# Altium PCB PCB.PcbDoc (part 3 of 3)
Units mm, origin at the board's own origin, x right, y up, seen from the top; angles counter-clockwise.
Board outline 53 x 36 mm, 2 copper layers (Top Layer, Bottom Layer); 30 components, 49 nets, 163 pads, 111 vias.
Unrouted connection lines stored in the file: 1.
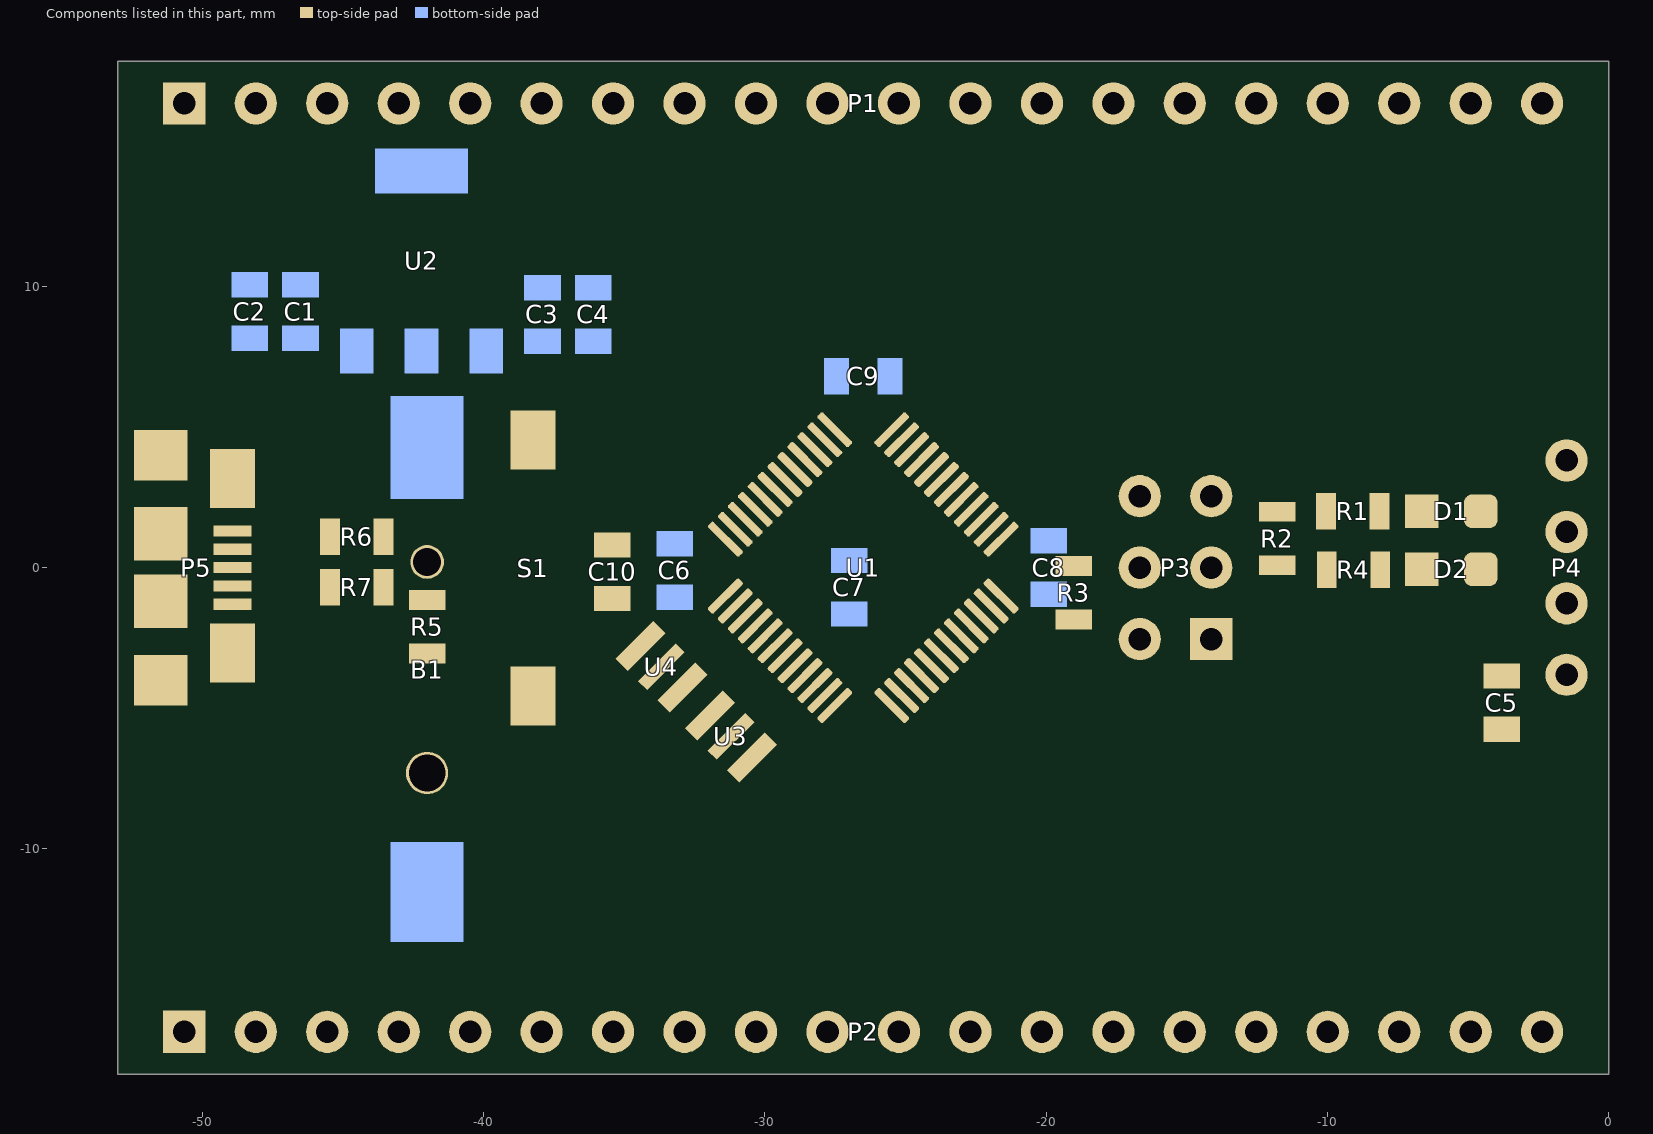
[diagram p3: the components of this part, seen from the top]

## Via types
v1: diameter 0.8, hole 0.5, Top Layer to Bottom Layer, tented both sides, 111 vias

## Nets (pads, with @x,y where several pads share a name; then routed paths per layer and width w, separated by ;. In a path a pad name is that pad's centre, name@x,y a point inside that pad or via, vN(x,y) a via of type N, cw(c..) or ccw(c..) an arc to the next point about the centre after c; other vN are vias at no path point) (continued)
copper on no net: (continued)
  Bottom Layer w0.018: -24.704,-12.861 -24.509,-12.861 ; -24.704,-12.843 -24.491,-12.843 ; -24.704,-12.665 -24.491,-12.665 ; -24.704,-12.647 -24.509,-12.647 ; -24.704,-10.247 -24.153,-10.247 ; -24.704,-10.229 -24.153,-10.229 ; -24.704,-10.211 -24.153,-10.211 ; -24.704,-10.194 -24.171,-10.194 ; -24.687,-13.625 -24.491,-13.625 ; -24.687,-13.376 -24.491,-13.376 ; -24.687,-10.318 -24.135,-10.318 ; -24.687,-10.3 -24.135,-10.3 ; -24.687,-10.282 -24.135,-10.282 ; -24.687,-10.265 -24.153,-10.265 ; -24.669,-12.878 -24.544,-12.878 ; -24.669,-12.629 -24.544,-12.629 ; -24.669,-10.389 -24.118,-10.389 ; -24.669,-10.371 -24.118,-10.371 ; -24.669,-10.354 -24.118,-10.354 ; -24.669,-10.336 -24.135,-10.336 ; -24.651,-13.643 -24.527,-13.643 ; -24.651,-13.358 -24.527,-13.358 ; -24.651,-10.442 -24.1,-10.442 ; -24.651,-10.425 -24.1,-10.425 ; -24.651,-10.407 -24.118,-10.407 ; -24.633,-10.514 -24.082,-10.514 ; -24.633,-10.496 -24.082,-10.496 ; -24.633,-10.478 -24.1,-10.478 ; -24.633,-10.46 -24.1,-10.46 ; -24.615,-10.585 -24.064,-10.585 ; -24.615,-10.567 -24.064,-10.567 ; -24.615,-10.549 -24.082,-10.549 ; -24.615,-10.531 -24.082,-10.531 ; -24.598,-10.602 -24.064,-10.602 ; -24.562,-12.825 -24.473,-12.825 ; -24.562,-12.683 -24.473,-12.683 ; -24.544,-13.589 -24.455,-13.589 ; -24.544,-13.412 -24.455,-13.412 ; -24.544,-12.807 -24.473,-12.807 ; -24.544,-12.789 -24.473,-12.789 ; -24.544,-12.772 -24.473,-12.772 ; -24.544,-12.754 -24.473,-12.754 ; -24.544,-12.736 -24.473,-12.736 ; -24.544,-12.718 -24.473,-12.718 ; -24.544,-12.7 -24.473,-12.7 ; -24.544,-11.776 -23.762,-11.776 ; -24.544,-11.758 -23.762,-11.758 ; -24.527,-11.847 -23.762,-11.847 ; -24.527,-11.829 -23.762,-11.829 ; -24.527,-11.811 -23.762,-11.811 ; -24.527,-11.794 -23.762,-11.794 ; -24.509,-13.572 -24.455,-13.572 ; -24.509,-13.554 -24.438,-13.554 ; -24.509,-13.447 -24.438,-13.447 ; -24.509,-13.429 -24.455,-13.429 ; -24.509,-11.918 -23.762,-11.918 ; -24.509,-11.9 -23.762,-11.9 ; -24.509,-11.883 -23.762,-11.883 ; -24.509,-11.865 -23.762,-11.865 ; -24.509,-11.011 -23.958,-11.011 ; -24.509,-10.994 -23.958,-10.994 ; -24.509,-10.976 -23.975,-10.976 ; -24.509,-10.958 -23.975,-10.958 ; -24.491,-13.536 -24.438,-13.536 ; -24.491,-13.518 -24.438,-13.518 ; -24.491,-13.501 -24.438,-13.501 ; -24.491,-13.483 -24.438,-13.483 ; -24.491,-13.465 -24.438,-13.465 ; -24.491,-11.989 -23.78,-11.989 ; -24.491,-11.972 -23.762,-11.972 ; -24.491,-11.954 -23.762,-11.954 ; -24.491,-11.936 -23.762,-11.936 ; -24.491,-11.083 -23.94,-11.083 ; -24.491,-11.065 -23.94,-11.065 ; -24.491,-11.047 -23.958,-11.047 ; -24.491,-11.029 -23.958,-11.029 ; -24.473,-12.06 -23.869,-12.06 ; -24.473,-12.043 -23.833,-12.043 ; -24.473,-12.025 -23.798,-12.025 ; -24.473,-12.007 -23.78,-12.007 ; -24.473,-11.154 -23.922,-11.154 ; -24.473,-11.136 -23.922,-11.136 ; -24.473,-11.118 -23.94,-11.118 ; -24.473,-11.1 -23.94,-11.1 ; -24.455,-12.078 -23.922,-12.078 ; -24.455,-11.225 -23.904,-11.225 ; -24.455,-11.207 -23.904,-11.207 ; -24.455,-11.189 -23.904,-11.189 ; -24.455,-11.171 -23.922,-11.171 ; -24.438,-11.296 -23.886,-11.296 ; -24.438,-11.278 -23.886,-11.278 ; -24.438,-11.26 -23.886,-11.26 ; -24.438,-11.243 -23.904,-11.243 ; -24.42,-12.683 -24.278,-12.683 ; -24.42,-12.665 -24.278,-12.665 ; -24.42,-12.647 -24.349,-12.647 ; -24.42,-12.629 -24.366,-12.629 ; -24.42,-11.367 -23.869,-11.367 ; -24.42,-11.349 -23.869,-11.349 ; -24.42,-11.331 -23.869,-11.331 ; -24.42,-11.314 -23.886,-11.314 ; -24.402,-11.438 -23.851,-11.438 ; -24.402,-11.42 -23.851,-11.42 ; -24.402,-11.403 -23.851,-11.403 ; -24.402,-11.385 -23.869,-11.385 ; -24.384,-13.643 -24.331,-13.643 ; -24.384,-13.625 -24.331,-13.625 ; -24.384,-13.607 -24.331,-13.607 ; -24.384,-13.589 -24.331,-13.589 ; -24.384,-13.572 -24.331,-13.572 ; -24.384,-13.554 -24.331,-13.554 ; -24.384,-13.536 -24.331,-13.536 ; -24.384,-13.518 -24.331,-13.518 ; -24.384,-13.501 -24.331,-13.501 ; -24.384,-13.483 -24.331,-13.483 ; -24.384,-13.465 -24.331,-13.465 ; -24.384,-13.447 -24.331,-13.447 ; -24.384,-13.429 -24.331,-13.429 ; -24.384,-13.412 -24.331,-13.412 ; -24.384,-13.394 -24.331,-13.394 ; -24.384,-13.376 -24.331,-13.376 ; -24.384,-13.358 -24.331,-13.358 ; -24.384,-11.509 -23.833,-11.509 ; -24.384,-11.491 -23.833,-11.491 ; -24.384,-11.474 -23.833,-11.474 ; -24.384,-11.456 -23.851,-11.456 ; -24.366,-11.74 -23.78,-11.74 ; -24.366,-11.58 -23.815,-11.58 ; -24.366,-11.563 -23.815,-11.563 ; -24.366,-11.545 -23.815,-11.545 ; -24.366,-11.527 -23.833,-11.527 ; -24.349,-12.754 -24.278,-12.754 ; -24.349,-12.736 -24.278,-12.736 ; -24.349,-12.718 -24.278,-12.718 ; -24.349,-12.7 -24.278,-12.7 ; -24.349,-11.723 -23.78,-11.723 ; -24.349,-11.705 -23.78,-11.705 ; -24.349,-11.669 -23.798,-11.669 ; -24.349,-11.651 -23.798,-11.651 ; -24.349,-11.634 -23.798,-11.634 ; -24.349,-11.616 -23.798,-11.616 ; -24.349,-11.598 -23.815,-11.598 ; -24.331,-12.878 -24.278,-12.878 ; -24.331,-12.861 -24.278,-12.861 ; -24.331,-12.843 -24.278,-12.843 ; -24.331,-12.825 -24.278,-12.825 ; -24.331,-12.807 -24.278,-12.807 ; -24.331,-12.789 -24.278,-12.789 ; -24.331,-12.772 -24.278,-12.772 ; -24.331,-12.647 -24.278,-12.647 ; -24.331,-12.629 -24.278,-12.629 ; -24.331,-11.687 -23.78,-11.687 ; -24.295,-12.096 -24.082,-12.096 ; -24.278,-13.554 -24.224,-13.554 ; -24.278,-13.536 -24.224,-13.536 ; -24.278,-13.518 -24.224,-13.518 ; -24.278,-13.501 -24.224,-13.501 ; -24.278,-13.483 -24.224,-13.483 ; -24.278,-13.465 -24.224,-13.465 ; -24.278,-13.447 -24.224,-13.447 ; -24.26,-13.589 -24.189,-13.589 ; -24.26,-13.572 -24.206,-13.572 ; -24.26,-13.429 -24.206,-13.429 ; -24.26,-13.412 -24.189,-13.412 ; -24.242,-13.607 -24.029,-13.607 ; -24.242,-13.394 -24.029,-13.394 ; -24.224,-13.625 -24.029,-13.625 ; -24.224,-13.376 -24.029,-13.376 ; -24.206,-13.643 -24.029,-13.643 ; -24.206,-13.358 -24.029,-13.358 ; -24.206,-12.878 -24.1,-12.878 ; -24.206,-12.861 -24.082,-12.861 ; -24.206,-12.843 -24.064,-12.843 ; -24.189,-12.665 -24.011,-12.665 ; -24.189,-12.647 -24.011,-12.647 ; -24.189,-12.629 -24.011,-12.629 ; -24.153,-12.825 -24.064,-12.825 ; -24.135,-12.807 -24.064,-12.807 ; -24.135,-12.789 -24.064,-12.789 ; -24.135,-12.772 -24.064,-12.772 ; -24.135,-12.754 -24.064,-12.754 ; -24.135,-12.736 -24.064,-12.736 ; -24.135,-12.718 -24.064,-12.718 ; -24.135,-12.7 -24.064,-12.7 ; -24.135,-12.683 -24.064,-12.683 ; -24.135,-12.612 -24.064,-12.612 ; -24.135,-12.594 -24.064,-12.594 ; -24.135,-12.576 -24.064,-12.576 ; -24.135,-12.558 -24.1,-12.558 ; -24.082,-13.589 -24.029,-13.589 ; -24.082,-13.572 -24.029,-13.572 ; -24.082,-13.554 -24.029,-13.554 ; -24.082,-13.536 -24.029,-13.536 ; -24.082,-13.518 -24.029,-13.518 ; -24.082,-13.501 -24.029,-13.501 ; -24.082,-13.483 -24.029,-13.483 ; -24.082,-13.465 -24.029,-13.465 ; -24.082,-13.447 -24.029,-13.447 ; -24.082,-13.429 -24.029,-13.429 ; -24.082,-13.412 -24.029,-13.412 ; -23.993,-13.643 -23.94,-13.643 ; -23.975,-13.625 -23.922,-13.625 ; -23.975,-13.607 -23.922,-13.607 ; -23.975,-13.589 -23.922,-13.589 ; -23.975,-12.878 -23.851,-12.878 ; -23.975,-12.861 -23.815,-12.861 ; -23.975,-12.843 -23.798,-12.843 ; -23.975,-12.665 -23.798,-12.665 ; -23.975,-12.647 -23.815,-12.647 ; -23.975,-12.629 -23.851,-12.629 ; -23.958,-13.572 -23.726,-13.572 ; -23.958,-13.554 -23.726,-13.554 ; -23.958,-13.536 -23.726,-13.536 ; -23.94,-13.518 -23.886,-13.518 ; -23.94,-13.501 -23.886,-13.501 ; -23.922,-13.483 -23.869,-13.483 ; -23.922,-13.465 -23.869,-13.465 ; -23.922,-13.447 -23.851,-13.447 ; -23.922,-10.158 -23.371,-10.158 ; -23.904,-13.429 -23.851,-13.429 ; -23.904,-13.412 -23.851,-13.412 ; -23.904,-10.229 -23.353,-10.229 ; -23.904,-10.211 -23.353,-10.211 ; -23.904,-10.194 -23.353,-10.194 ; -23.904,-10.176 -23.353,-10.176 ; -23.886,-13.394 -23.798,-13.394 ; -23.886,-13.376 -23.798,-13.376 ; -23.886,-13.358 -23.798,-13.358 ; -23.886,-12.825 -23.798,-12.825 ; -23.886,-12.683 -23.798,-12.683 ; -23.886,-10.3 -23.335,-10.3 ; -23.886,-10.282 -23.335,-10.282 ; -23.886,-10.265 -23.335,-10.265 ; -23.886,-10.247 -23.335,-10.247 ; -23.869,-12.807 -23.78,-12.807 ; -23.869,-12.7 -23.78,-12.7 ; -23.869,-10.371 -23.317,-10.371 ; -23.869,-10.354 -23.317,-10.354 ; -23.869,-10.336 -23.317,-10.336 ; -23.869,-10.318 -23.317,-10.318 ; -23.851,-12.789 -23.78,-12.789 ; -23.851,-12.772 -23.78,-12.772 ; -23.851,-12.754 -23.78,-12.754 ; -23.851,-12.736 -23.78,-12.736 ; -23.851,-12.718 -23.78,-12.718 ; -23.851,-10.442 -23.3,-10.442 ; -23.851,-10.425 -23.3,-10.425 ; -23.851,-10.407 -23.3,-10.407 ; -23.851,-10.389 -23.3,-10.389 ; -23.833,-13.447 -23.762,-13.447 ; -23.833,-13.429 -23.78,-13.429 ; -23.833,-13.412 -23.78,-13.412 ; -23.833,-10.514 -23.282,-10.514 ; -23.833,-10.496 -23.282,-10.496 ; -23.833,-10.478 -23.282,-10.478 ; -23.833,-10.46 -23.282,-10.46 ; -23.815,-13.483 -23.762,-13.483 ; -23.815,-13.465 -23.762,-13.465 ; -23.815,-10.585 -23.264,-10.585 ; -23.815,-10.567 -23.264,-10.567 ; -23.815,-10.549 -23.264,-10.549 ; -23.815,-10.531 -23.282,-10.531 ; -23.798,-13.518 -23.744,-13.518 ; -23.798,-13.501 -23.744,-13.501 ; -23.798,-10.656 -23.246,-10.656 ; -23.798,-10.638 -23.246,-10.638 ; -23.798,-10.62 -23.246,-10.62 ; -23.798,-10.602 -23.264,-10.602 ; -23.78,-10.709 -23.229,-10.709 ; -23.78,-10.691 -23.229,-10.691 ; -23.78,-10.674 -23.246,-10.674 ; -23.762,-13.625 -23.709,-13.625 ; -23.762,-13.607 -23.709,-13.607 ; -23.762,-13.589 -23.709,-13.589 ; -23.762,-10.78 -23.211,-10.78 ; -23.762,-10.762 -23.211,-10.762 ; -23.762,-10.745 -23.229,-10.745 ; -23.762,-10.727 -23.229,-10.727 ; -23.744,-13.643 -23.691,-13.643 ; -23.744,-10.851 -23.193,-10.851 ; -23.744,-10.834 -23.193,-10.834 ; -23.744,-10.816 -23.211,-10.816 ; -23.744,-10.798 -23.211,-10.798 ; -23.726,-10.922 -23.175,-10.922 ; -23.726,-10.905 -23.175,-10.905 ; -23.726,-10.887 -23.193,-10.887 ; -23.726,-10.869 -23.193,-10.869 ; -23.709,-12.772 -23.477,-12.772 ; -23.709,-12.754 -23.477,-12.754 ; -23.709,-12.736 -23.477,-12.736 ; -23.709,-12.718 -23.655,-12.718 ; -23.709,-12.7 -23.638,-12.7 ; -23.709,-12.683 -23.638,-12.683 ; -23.709,-10.994 -23.157,-10.994 ; -23.709,-10.976 -23.157,-10.976 ; -23.709,-10.958 -23.175,-10.958 ; -23.709,-10.94 -23.175,-10.94 ; -23.691,-12.878 -23.549,-12.878 ; -23.691,-12.861 -23.513,-12.861 ; -23.691,-12.843 -23.495,-12.843 ; -23.691,-12.825 -23.673,-12.825 ; -23.691,-12.665 -23.495,-12.665 ; -23.691,-11.065 -23.14,-11.065 ; -23.691,-11.047 -23.14,-11.047 ; -23.691,-11.029 -23.157,-11.029 ; -23.691,-11.011 -23.157,-11.011 ; -23.673,-12.647 -23.513,-12.647 ; -23.673,-11.136 -23.122,-11.136 ; -23.673,-11.118 -23.122,-11.118 ; -23.673,-11.1 -23.14,-11.1 ; -23.673,-11.083 -23.14,-11.083 ; -23.655,-13.643 -23.602,-13.643 ; -23.655,-13.625 -23.602,-13.625 ; -23.655,-13.607 -23.602,-13.607 ; -23.655,-13.589 -23.602,-13.589 ; -23.655,-13.572 -23.602,-13.572 ; -23.655,-13.554 -23.602,-13.554 ; -23.655,-13.536 -23.602,-13.536 ; -23.655,-13.518 -23.602,-13.518 ; -23.655,-13.501 -23.602,-13.501 ; -23.655,-13.483 -23.602,-13.483 ; -23.655,-13.465 -23.602,-13.465 ; -23.655,-13.447 -23.602,-13.447 ; -23.655,-13.429 -23.602,-13.429 ; -23.655,-13.412 -23.549,-13.412 ; -23.655,-13.394 -23.549,-13.394 ; -23.655,-13.376 -23.566,-13.376 ; -23.655,-13.358 -23.566,-13.358 ; -23.655,-12.629 -23.531,-12.629 ; -23.655,-11.207 -23.104,-11.207 ; -23.655,-11.189 -23.104,-11.189 ; -23.655,-11.171 -23.122,-11.171 ; -23.655,-11.154 -23.122,-11.154 ; -23.638,-11.278 -23.086,-11.278 ; -23.638,-11.26 -23.086,-11.26 ; -23.638,-11.243 -23.104,-11.243 ; -23.638,-11.225 -23.104,-11.225 ; -23.62,-11.349 -23.069,-11.349 ; -23.62,-11.331 -23.069,-11.331 ; -23.62,-11.314 -23.086,-11.314 ; -23.62,-11.296 -23.086,-11.296 ; -23.602,-11.42 -23.051,-11.42 ; -23.602,-11.403 -23.051,-11.403 ; -23.602,-11.385 -23.069,-11.385 ; -23.602,-11.367 -23.069,-11.367 ; -23.584,-13.465 -23.531,-13.465 ; -23.584,-13.447 -23.531,-13.447 ; -23.584,-13.429 -23.549,-13.429 ; -23.584,-11.491 -23.033,-11.491 ; -23.584,-11.474 -23.033,-11.474 ; -23.584,-11.456 -23.051,-11.456 ; -23.584,-11.438 -23.051,-11.438 ; -23.566,-13.536 -23.513,-13.536 ; -23.566,-13.518 -23.513,-13.518 ; -23.566,-13.501 -23.513,-13.501 ; -23.566,-13.483 -23.531,-13.483 ; -23.566,-12.825 -23.477,-12.825 ; -23.566,-11.563 -23.015,-11.563 ; -23.566,-11.545 -23.015,-11.545 ; -23.566,-11.527 -23.033,-11.527 ; -23.566,-11.509 -23.033,-11.509 ; -23.549,-13.607 -23.46,-13.607 ; -23.549,-13.589 -23.46,-13.589 ; -23.549,-13.572 -23.46,-13.572 ; -23.549,-13.554 -23.513,-13.554 ; -23.549,-12.807 -23.477,-12.807 ; -23.549,-12.7 -23.477,-12.7 ; -23.549,-12.683 -23.477,-12.683 ; -23.549,-11.634 -22.997,-11.634 ; -23.549,-11.616 -22.997,-11.616 ; -23.549,-11.598 -23.015,-11.598 ; -23.549,-11.58 -23.015,-11.58 ; -23.531,-13.643 -23.477,-13.643 ; -23.531,-13.625 -23.477,-13.625 ; -23.531,-12.789 -23.477,-12.789 ; -23.531,-12.718 -23.477,-12.718 ; -23.531,-11.705 -22.98,-11.705 ; -23.531,-11.687 -22.98,-11.687 ; -23.531,-11.669 -22.997,-11.669 ; -23.531,-11.651 -22.997,-11.651 ; -23.513,-11.776 -22.962,-11.776 ; -23.513,-11.758 -22.962,-11.758 ; -23.513,-11.74 -22.98,-11.74 ; -23.513,-11.723 -22.98,-11.723 ; -23.495,-13.554 -23.46,-13.554 ; -23.495,-13.536 -23.442,-13.536 ; -23.495,-13.518 -23.442,-13.518 ; -23.495,-13.501 -23.442,-13.501 ; -23.495,-11.847 -22.944,-11.847 ; -23.495,-11.829 -22.944,-11.829 ; -23.495,-11.811 -22.962,-11.811 ; -23.495,-11.794 -22.962,-11.794 ; -23.477,-13.483 -23.442,-13.483 ; -23.477,-13.465 -23.424,-13.465 ; -23.477,-13.447 -23.424,-13.447 ; -23.477,-11.918 -22.926,-11.918 ; -23.477,-11.9 -22.926,-11.9 ; -23.477,-11.883 -22.944,-11.883 ; -23.477,-11.865 -22.944,-11.865 ; -23.46,-13.429 -23.424,-13.429 ; -23.46,-13.412 -23.353,-13.412 ; -23.46,-13.394 -23.353,-13.394 ; -23.46,-11.989 -22.909,-11.989 ; -23.46,-11.972 -22.909,-11.972 ; -23.46,-11.954 -22.926,-11.954 ; -23.46,-11.936 -22.926,-11.936 ; -23.442,-13.376 -23.353,-13.376 ; -23.442,-13.358 -23.353,-13.358 ; -23.442,-12.06 -22.891,-12.06 ; -23.442,-12.043 -22.891,-12.043 ; -23.442,-12.025 -22.909,-12.025 ; -23.442,-12.007 -22.909,-12.007 ; -23.424,-12.078 -22.891,-12.078 ; -23.406,-13.643 -23.353,-13.643 ; -23.406,-13.625 -23.353,-13.625 ; -23.406,-13.607 -23.353,-13.607 ; -23.406,-13.589 -23.353,-13.589 ; -23.406,-13.572 -23.353,-13.572 ; -23.406,-13.554 -23.353,-13.554 ; -23.406,-13.536 -23.353,-13.536 ; -23.406,-13.518 -23.353,-13.518 ; -23.406,-13.501 -23.353,-13.501 ; -23.406,-13.483 -23.353,-13.483 ; -23.406,-13.465 -23.353,-13.465 ; -23.406,-13.447 -23.353,-13.447 ; -23.406,-13.429 -23.353,-13.429 ; -23.389,-12.878 -23.317,-12.878 ; -23.389,-12.861 -23.317,-12.861 ; -23.389,-12.843 -23.317,-12.843 ; -23.389,-12.825 -23.317,-12.825 ; -23.389,-12.807 -23.317,-12.807 ; -23.389,-12.789 -23.317,-12.789 ; -23.389,-12.772 -23.317,-12.772 ; -23.389,-12.754 -23.317,-12.754 ; -23.389,-12.736 -23.317,-12.736 ; -23.389,-12.718 -23.317,-12.718 ; -23.389,-12.7 -23.317,-12.7 ; -23.389,-12.683 -23.317,-12.683 ; -23.389,-12.665 -23.317,-12.665 ; -23.389,-12.647 -23.317,-12.647 ; -23.389,-12.629 -23.317,-12.629 ; -23.389,-12.612 -23.317,-12.612 ; -23.389,-12.594 -23.317,-12.594 ; -23.389,-12.576 -23.317,-12.576 ; -23.389,-12.558 -23.317,-12.558 ; -23.389,-12.54 -23.317,-12.54 ; -23.389,-12.523 -23.317,-12.523 ; -23.389,-12.505 -23.317,-12.505 ; -23.282,-13.643 -23.229,-13.643 ; -23.282,-13.625 -23.229,-13.625 ; -23.282,-13.607 -23.229,-13.607 ; -23.282,-13.589 -23.229,-13.589 ; -23.282,-13.572 -23.229,-13.572 ; -23.282,-13.554 -23.229,-13.554 ; -23.282,-13.536 -23.229,-13.536 ; -23.282,-13.518 -23.051,-13.518 ; -23.282,-13.501 -23.051,-13.501 ; -23.282,-13.483 -23.051,-13.483 ; -23.282,-13.465 -23.229,-13.465 ; -23.282,-13.447 -23.229,-13.447 ; -23.282,-13.429 -23.229,-13.429 ; -23.282,-13.412 -23.229,-13.412 ; -23.282,-13.394 -23.229,-13.394 ; -23.282,-13.376 -23.229,-13.376 ; -23.282,-13.358 -23.229,-13.358 ; -23.229,-12.878 -23.015,-12.878 ; -23.229,-12.861 -23.015,-12.861 ; -23.229,-12.843 -23.015,-12.843 ; -23.229,-12.576 -23.015,-12.576 ; -23.229,-12.558 -23.015,-12.558 ; -23.229,-12.54 -23.015,-12.54 ; -23.211,-12.718 -23.015,-12.718 ; -23.211,-12.7 -23.015,-12.7 ; -23.211,-12.683 -23.015,-12.683 ; -23.104,-13.643 -23.051,-13.643 ; -23.104,-13.625 -23.051,-13.625 ; -23.104,-13.607 -23.051,-13.607 ; -23.104,-13.589 -23.051,-13.589 ; -23.104,-13.572 -23.051,-13.572 ; -23.104,-13.554 -23.051,-13.554 ; -23.104,-13.536 -23.051,-13.536 ; -23.104,-13.465 -23.051,-13.465 ; -23.104,-13.447 -23.051,-13.447 ; -23.104,-13.429 -23.051,-13.429 ; -23.104,-13.412 -23.051,-13.412 ; -23.104,-13.394 -23.051,-13.394 ; -23.104,-13.376 -23.051,-13.376 ; -23.104,-13.358 -23.051,-13.358 ; -23.086,-12.825 -23.015,-12.825 ; -23.086,-12.807 -23.015,-12.807 ; -23.086,-12.789 -23.015,-12.789 ; -23.086,-12.772 -23.015,-12.772 ; -23.086,-12.754 -23.015,-12.754 ; -23.086,-12.736 -23.015,-12.736 ; -23.086,-12.665 -23.015,-12.665 ; -23.086,-12.647 -23.015,-12.647 ; -23.086,-12.629 -23.015,-12.629 ; -23.086,-12.612 -23.015,-12.612 ; -23.086,-12.594 -23.015,-12.594 ; -23.015,-13.643 -22.962,-13.643 ; -22.997,-13.625 -22.944,-13.625 ; -22.997,-13.607 -22.944,-13.607 ; -22.997,-13.589 -22.944,-13.589 ; -22.98,-13.572 -22.749,-13.572 ; -22.98,-13.554 -22.749,-13.554 ; -22.98,-13.536 -22.749,-13.536 ; -22.962,-13.518 -22.909,-13.518 ; -22.962,-13.501 -22.909,-13.501 ; -22.944,-13.483 -22.891,-13.483 ; -22.944,-13.465 -22.891,-13.465 ; -22.944,-13.447 -22.873,-13.447 ; -22.926,-13.429 -22.873,-13.429 ; -22.926,-13.412 -22.873,-13.412 ; -22.909,-13.394 -22.82,-13.394 ; -22.909,-13.376 -22.82,-13.376 ; -22.909,-13.358 -22.82,-13.358 ; -22.855,-13.447 -22.784,-13.447 ; -22.855,-13.429 -22.802,-13.429 ; -22.855,-13.412 -22.802,-13.412 ; -22.837,-13.483 -22.784,-13.483 ; -22.837,-13.465 -22.784,-13.465 ; -22.82,-13.518 -22.766,-13.518 ; -22.82,-13.501 -22.766,-13.501 ; -22.784,-13.625 -22.731,-13.625 ; -22.784,-13.607 -22.731,-13.607 ; -22.784,-13.589 -22.731,-13.589 ; -22.766,-13.643 -22.713,-13.643 ; -22.766,-12.078 -22.144,-12.078 ; -22.766,-12.06 -22.144,-12.06 ; -22.766,-12.043 -22.144,-12.043 ; -22.766,-12.025 -22.144,-12.025 ; -22.766,-12.007 -22.144,-12.007 ; -22.766,-11.989 -22.144,-11.989 ; -22.766,-11.972 -22.144,-11.972 ; -22.766,-11.954 -22.144,-11.954 ; -22.766,-11.936 -22.144,-11.936 ; -22.766,-11.918 -22.144,-11.918 ; -22.766,-11.9 -22.162,-11.9 ; -22.766,-11.883 -22.162,-11.883 ; -22.766,-11.865 -22.162,-11.865 ; -22.766,-11.847 -22.162,-11.847 ; -22.766,-11.829 -22.162,-11.829 ; -22.766,-11.811 -22.162,-11.811 ; -22.766,-11.794 -22.162,-11.794 ; -22.766,-11.776 -22.162,-11.776 ; -22.766,-11.758 -22.162,-11.758 ; -22.766,-11.74 -21.095,-11.74 ; -22.766,-11.723 -21.113,-11.723 ; -22.766,-11.705 -21.131,-11.705 ; -22.766,-11.687 -21.131,-11.687 ; -22.749,-12.914 -22.66,-12.914 ; -22.749,-12.896 -22.677,-12.896 ; -22.749,-12.878 -22.677,-12.878 ; -22.749,-12.861 -22.535,-12.861 ; -22.749,-12.843 -22.517,-12.843 ; -22.749,-12.825 -22.642,-12.825 ; -22.749,-12.807 -22.66,-12.807 ; -22.749,-12.789 -22.677,-12.789 ; -22.749,-12.772 -22.677,-12.772 ; -22.749,-12.754 -22.677,-12.754 ; -22.749,-12.736 -22.677,-12.736 ; -22.749,-12.718 -22.677,-12.718 ; -22.749,-12.7 -22.677,-12.7 ; -22.749,-12.683 -22.66,-12.683 ; -22.749,-12.665 -22.517,-12.665 ; -22.749,-12.647 -22.535,-12.647 ; -22.749,-12.629 -22.677,-12.629 ; -22.749,-11.669 -21.148,-11.669 ; -22.749,-11.651 -21.148,-11.651 ; -22.749,-11.634 -21.166,-11.634 ; -22.749,-11.616 -21.166,-11.616 ; -22.749,-11.598 -21.184,-11.598 ; -22.749,-11.58 -21.184,-11.58 ; -22.749,-11.563 -21.202,-11.563 ; -22.749,-11.545 -21.202,-11.545 ; -22.749,-11.527 -21.219,-11.527 ; -22.749,-11.509 -21.219,-11.509 ; -22.749,-11.491 -21.237,-11.491 ; -22.749,-11.474 -21.237,-11.474 ; -22.749,-11.456 -21.255,-11.456 ; -22.749,-11.438 -21.273,-11.438 ; -22.749,-11.42 -21.273,-11.42 ; -22.749,-11.403 -21.291,-11.403 ; -22.749,-11.385 -21.291,-11.385 ; -22.749,-11.367 -22.18,-11.367 ; -22.749,-11.349 -22.18,-11.349 ; -22.749,-11.331 -22.18,-11.331 ; -22.749,-11.314 -22.18,-11.314 ; -22.749,-11.296 -22.18,-11.296 ; -22.749,-11.278 -22.18,-11.278 ; -22.749,-11.26 -22.18,-11.26 ; -22.749,-11.243 -22.197,-11.243 ; -22.749,-11.225 -22.197,-11.225 ; -22.731,-12.949 -22.517,-12.949 ; -22.731,-12.932 -22.642,-12.932 ; -22.731,-11.207 -22.197,-11.207 ; -22.731,-11.189 -22.197,-11.189 ; -22.731,-11.171 -22.197,-11.171 ; -22.731,-11.154 -22.197,-11.154 ; -22.731,-11.136 -22.197,-11.136 ; -22.731,-11.118 -22.197,-11.118 ; -22.731,-11.1 -22.197,-11.1 ; -22.731,-11.083 -22.197,-11.083 ; -22.731,-11.065 -22.197,-11.065 ; -22.731,-11.047 -22.197,-11.047 ; -22.731,-11.029 -22.197,-11.029 ; -22.731,-11.011 -22.197,-11.011 ; -22.731,-10.994 -22.197,-10.994 ; -22.731,-10.976 -22.197,-10.976 ; -22.731,-10.958 -22.197,-10.958 ; -22.731,-10.94 -22.197,-10.94 ; -22.731,-10.922 -22.215,-10.922 ; -22.731,-10.905 -22.215,-10.905 ; -22.731,-10.887 -22.215,-10.887 ; -22.731,-10.869 -22.215,-10.869 ; -22.731,-10.851 -22.215,-10.851 ; -22.731,-10.834 -22.215,-10.834 ; -22.731,-10.816 -22.215,-10.816 ; -22.731,-10.798 -22.215,-10.798 ; -22.731,-10.78 -22.215,-10.78 ; -22.731,-10.762 -22.215,-10.762 ; -22.731,-10.745 -22.215,-10.745 ; -22.713,-12.967 -22.517,-12.967 ; -22.713,-10.727 -22.215,-10.727 ; -22.713,-10.709 -22.215,-10.709 ; -22.713,-10.691 -22.215,-10.691 ; -22.713,-10.674 -22.215,-10.674 ; -22.713,-10.656 -22.215,-10.656 ; -22.713,-10.638 -22.215,-10.638 ; -22.713,-10.62 -21.699,-10.62 ; -22.713,-10.602 -21.717,-10.602 ; -22.713,-10.585 -21.717,-10.585 ; -22.713,-10.567 -21.735,-10.567 ; -22.713,-10.549 -21.735,-10.549 ; -22.713,-10.531 -21.753,-10.531 ; -22.713,-10.514 -21.753,-10.514 ; -22.713,-10.496 -21.771,-10.496 ; -22.713,-10.478 -21.788,-10.478 ; -22.713,-10.46 -21.788,-10.46 ; -22.713,-10.442 -21.806,-10.442 ; -22.713,-10.425 -21.824,-10.425 ; -22.713,-10.407 -21.842,-10.407 ; -22.713,-10.389 -21.86,-10.389 ; -22.713,-10.371 -21.877,-10.371 ; -22.713,-10.354 -21.895,-10.354 ; -22.713,-10.336 -21.913,-10.336 ; -22.713,-10.318 -21.931,-10.318 ; -22.713,-10.3 -21.948,-10.3 ; -22.713,-10.282 -21.984,-10.282 ; -22.695,-12.985 -22.535,-12.985 ; -22.695,-10.265 -22.002,-10.265 ; -22.695,-10.247 -22.037,-10.247 ; -22.695,-10.229 -22.073,-10.229 ; -22.695,-10.211 -22.108,-10.211 ; -22.695,-10.194 -22.162,-10.194 ; -22.695,-10.176 -22.215,-10.176 ; -22.695,-10.158 -22.322,-10.158 ; -22.66,-12.629 -22.553,-12.629 ; -22.642,-12.878 -22.553,-12.878 ; -22.606,-12.825 -22.5,-12.825 ; -22.588,-12.807 -22.5,-12.807 ; -22.588,-12.683 -22.5,-12.683 ; -22.571,-12.789 -22.5,-12.789 ; -22.571,-12.772 -22.5,-12.772 ; -22.571,-12.754 -22.5,-12.754 ; -22.571,-12.736 -22.5,-12.736 ; -22.571,-12.718 -22.5,-12.718 ; -22.571,-12.7 -22.5,-12.7 ; -22.553,-12.932 -22.517,-12.932 ; -22.411,-12.878 -22.34,-12.878 ; -22.411,-12.861 -22.34,-12.861 ; -22.411,-12.843 -22.34,-12.843 ; -22.411,-12.825 -22.34,-12.825 ; -22.411,-12.807 -22.34,-12.807 ; -22.411,-12.789 -22.34,-12.789 ; -22.411,-12.772 -22.34,-12.772 ; -22.411,-12.754 -22.34,-12.754 ; -22.411,-12.736 -22.34,-12.736 ; -22.411,-12.718 -22.34,-12.718 ; -22.411,-12.7 -22.34,-12.7 ; -22.411,-12.683 -22.34,-12.683 ; -22.411,-12.665 -22.18,-12.665 ; -22.393,-12.647 -22.18,-12.647 ; -22.375,-12.629 -22.268,-12.629 ; -22.268,-12.683 -22.18,-12.683 ; -22.251,-12.878 -22.18,-12.878 ; -22.251,-12.861 -22.18,-12.861 ; -22.251,-12.843 -22.18,-12.843 ; -22.251,-12.825 -22.18,-12.825 ; -22.251,-12.807 -22.18,-12.807 ; -22.251,-12.789 -22.18,-12.789 ; -22.251,-12.772 -22.18,-12.772 ; -22.251,-12.754 -22.18,-12.754 ; -22.251,-12.736 -22.18,-12.736 ; -22.251,-12.718 -22.18,-12.718 ; -22.251,-12.7 -22.18,-12.7 ; -22.233,-12.629 -22.18,-12.629 ; -22.197,-10.656 -21.682,-10.656 ; -22.197,-10.638 -21.699,-10.638 ; -22.18,-10.691 -21.664,-10.691 ; -22.18,-10.674 -21.682,-10.674 ; -22.162,-10.727 -21.646,-10.727 ; -22.162,-10.709 -21.664,-10.709 ; -22.144,-10.762 -21.628,-10.762 ; -22.144,-10.745 -21.628,-10.745 ; -22.126,-10.798 -21.611,-10.798 ; -22.126,-10.78 -21.611,-10.78 ; -22.108,-10.851 -21.575,-10.851 ; -22.108,-10.834 -21.593,-10.834 ; -22.108,-10.816 -21.593,-10.816 ; -22.091,-10.887 -21.557,-10.887 ; -22.091,-10.869 -21.575,-10.869 ; -22.073,-12.878 -22.002,-12.878 ; -22.073,-12.861 -22.002,-12.861 ; -22.073,-12.843 -22.002,-12.843 ; -22.073,-12.825 -22.002,-12.825 ; -22.073,-12.807 -22.002,-12.807 ; -22.073,-12.789 -22.002,-12.789 ; -22.073,-12.772 -22.002,-12.772 ; -22.073,-12.754 -22.002,-12.754 ; -22.073,-12.736 -22.002,-12.736 ; -22.073,-12.718 -22.002,-12.718 ; -22.073,-12.7 -22.002,-12.7 ; -22.073,-12.683 -22.002,-12.683 ; -22.073,-12.665 -22.002,-12.665 ; -22.073,-12.647 -22.002,-12.647 ; -22.073,-12.629 -22.002,-12.629 ; -22.073,-12.558 -22.002,-12.558 ; -22.073,-12.54 -22.002,-12.54 ; -22.073,-12.523 -22.002,-12.523 ; -22.073,-10.922 -21.539,-10.922 ; -22.073,-10.905 -21.557,-10.905 ; -22.055,-10.958 -21.522,-10.958 ; -22.055,-10.94 -21.539,-10.94 ; -22.037,-10.994 -21.504,-10.994 ; -22.037,-10.976 -21.504,-10.976 ; -22.02,-11.047 -21.468,-11.047 ; -22.02,-11.029 -21.486,-11.029 ; -22.02,-11.011 -21.486,-11.011 ; -22.002,-11.083 -21.451,-11.083 ; -22.002,-11.065 -21.468,-11.065 ; -21.984,-11.118 -21.433,-11.118 ; -21.984,-11.1 -21.451,-11.1 ; -21.966,-11.154 -21.415,-11.154 ; -21.966,-11.136 -21.433,-11.136 ; -21.948,-12.878 -21.86,-12.878 ; -21.948,-11.189 -21.397,-11.189 ; -21.948,-11.171 -21.415,-11.171 ; -21.931,-12.861 -21.842,-12.861 ; -21.931,-12.629 -21.842,-12.629 ; -21.931,-11.225 -21.379,-11.225 ; -21.931,-11.207 -21.397,-11.207 ; -21.913,-12.843 -21.824,-12.843 ; -21.913,-12.647 -21.824,-12.647 ; -21.913,-11.278 -21.344,-11.278 ; -21.913,-11.26 -21.362,-11.26 ; -21.913,-11.243 -21.362,-11.243 ; -21.895,-12.825 -21.824,-12.825 ; -21.895,-12.807 -21.806,-12.807 ; -21.895,-12.665 -21.824,-12.665 ; -21.895,-11.314 -21.326,-11.314 ; -21.895,-11.296 -21.344,-11.296 ; -21.877,-12.789 -21.788,-12.789 ; -21.877,-12.7 -21.788,-12.7 ; -21.877,-12.683 -21.806,-12.683 ; -21.877,-11.349 -21.308,-11.349 ; -21.877,-11.331 -21.326,-11.331 ; -21.86,-12.772 -21.699,-12.772 ; -21.86,-12.718 -21.699,-12.718 ; -21.86,-11.367 -21.308,-11.367 ; -21.842,-12.754 -21.699,-12.754 ; -21.842,-12.736 -21.699,-12.736 ; -21.771,-12.878 -21.699,-12.878 ; -21.771,-12.861 -21.699,-12.861 ; -21.771,-12.843 -21.699,-12.843 ; -21.771,-12.825 -21.699,-12.825 ; -21.771,-12.807 -21.699,-12.807 ; -21.771,-12.789 -21.699,-12.789 ; -21.771,-12.7 -21.699,-12.7 ; -21.771,-12.683 -21.699,-12.683 ; -21.771,-12.665 -21.699,-12.665 ; -21.771,-12.647 -21.699,-12.647 ; -21.771,-12.629 -21.699,-12.629 ; -21.771,-12.612 -21.699,-12.612 ; -21.771,-12.594 -21.699,-12.594 ; -21.771,-12.576 -21.699,-12.576 ; -21.771,-12.558 -21.699,-12.558 ; -21.771,-12.54 -21.699,-12.54 ; -21.771,-12.523 -21.699,-12.523 ; -21.771,-12.505 -21.699,-12.505 ; -21.699,-11.758 -21.095,-11.758 ; -21.682,-11.794 -21.077,-11.794 ; -21.682,-11.776 -21.077,-11.776 ; -21.664,-11.829 -21.059,-11.829 ; -21.664,-11.811 -21.059,-11.811 ; -21.646,-11.865 -21.042,-11.865 ; -21.646,-11.847 -21.042,-11.847 ; -21.628,-11.918 -21.006,-11.918 ; -21.628,-11.9 -21.024,-11.9 ; -21.628,-11.883 -21.024,-11.883 ; -21.611,-12.878 -21.557,-12.878 ; -21.611,-12.861 -21.397,-12.861 ; -21.611,-12.843 -21.379,-12.843 ; -21.611,-12.825 -21.522,-12.825 ; -21.611,-12.807 -21.539,-12.807 ; -21.611,-12.789 -21.539,-12.789 ; -21.611,-12.772 -21.539,-12.772 ; -21.611,-12.754 -21.397,-12.754 ; -21.611,-12.736 -21.415,-12.736 ; -21.611,-12.718 -21.539,-12.718 ; -21.611,-12.7 -21.539,-12.7 ; -21.611,-12.683 -21.539,-12.683 ; -21.611,-11.954 -20.988,-11.954 ; -21.611,-11.936 -21.006,-11.936 ; -21.593,-12.665 -21.397,-12.665 ; -21.593,-12.647 -21.397,-12.647 ; -21.593,-11.989 -20.971,-11.989 ; -21.593,-11.972 -20.971,-11.972 ; -21.575,-12.629 -21.415,-12.629 ; -21.575,-12.043 -20.935,-12.043 ; -21.575,-12.025 -20.953,-12.025 ; -21.575,-12.007 -20.953,-12.007 ; -21.557,-12.078 -20.917,-12.078 ; -21.557,-12.06 -20.935,-12.06 ; -21.522,-12.878 -21.415,-12.878 ; -21.468,-12.772 -21.379,-12.772 ; -21.451,-12.825 -21.379,-12.825 ; -21.451,-12.807 -21.379,-12.807 ; -21.451,-12.789 -21.379,-12.789 ; -21.433,-12.683 -21.397,-12.683 ; -21.291,-12.878 -21.219,-12.878 ; -21.291,-12.861 -21.219,-12.861 ; -21.291,-12.843 -21.219,-12.843 ; -21.291,-12.825 -21.219,-12.825 ; -21.291,-12.807 -21.219,-12.807 ; -21.291,-12.789 -21.219,-12.789 ; -21.291,-12.772 -21.219,-12.772 ; -21.291,-12.754 -21.219,-12.754 ; -21.291,-12.736 -21.219,-12.736 ; -21.291,-12.718 -21.219,-12.718 ; -21.291,-12.7 -21.219,-12.7 ; -21.291,-12.683 -21.219,-12.683 ; -21.291,-12.665 -21.219,-12.665 ; -21.291,-12.647 -21.219,-12.647 ; -21.291,-12.629 -21.148,-12.629 ; -21.291,-12.612 -21.148,-12.612 ; -21.291,-12.594 -21.148,-12.594 ; -21.291,-12.576 -21.166,-12.576 ; -21.291,-12.558 -21.166,-12.558 ; -21.291,-12.54 -21.166,-12.54 ; -21.202,-12.683 -21.131,-12.683 ; -21.202,-12.665 -21.131,-12.665 ; -21.202,-12.647 -21.131,-12.647 ; -21.184,-12.736 -21.113,-12.736 ; -21.184,-12.718 -21.113,-12.718 ; -21.184,-12.7 -21.131,-12.7 ; -21.166,-12.789 -21.024,-12.789 ; -21.166,-12.772 -21.095,-12.772 ; -21.166,-12.754 -21.113,-12.754 ; -21.148,-12.843 -21.042,-12.843 ; -21.148,-12.825 -21.042,-12.825 ; -21.148,-12.807 -21.024,-12.807 ; -21.131,-12.878 -21.059,-12.878 ; -21.131,-12.861 -21.042,-12.861 ; -21.077,-12.772 -21.024,-12.772 ; -21.077,-12.754 -21.006,-12.754 ; -21.077,-12.736 -21.006,-12.736 ; -21.077,-12.718 -21.006,-12.718 ; -21.059,-12.7 -21.006,-12.7 ; -21.059,-12.683 -20.988,-12.683 ; -21.059,-12.665 -20.988,-12.665 ; -21.059,-9.287 -19.744,-9.287 ; -21.042,-12.647 -20.899,-12.647 ; -21.042,-12.629 -20.899,-12.629 ; -21.042,-12.612 -20.899,-12.612 ; -21.024,-12.594 -20.899,-12.594 ; -21.024,-12.576 -20.899,-12.576 ; -21.024,-12.558 -20.899,-12.558 ; -21.006,-12.54 -20.899,-12.54 ; -20.971,-12.878 -20.899,-12.878 ; -20.971,-12.861 -20.899,-12.861 ; -20.971,-12.843 -20.899,-12.843 ; -20.971,-12.825 -20.899,-12.825 ; -20.971,-12.807 -20.899,-12.807 ; -20.971,-12.789 -20.899,-12.789 ; -20.971,-12.772 -20.899,-12.772 ; -20.971,-12.754 -20.899,-12.754 ; -20.971,-12.736 -20.899,-12.736 ; -20.971,-12.718 -20.899,-12.718 ; -20.971,-12.7 -20.899,-12.7 ; -20.971,-12.683 -20.899,-12.683 ; -20.971,-12.665 -20.899,-12.665 ; -20.953,-9.305 -19.744,-9.305 ; -20.899,-9.322 -19.744,-9.322 ; -20.846,-9.34 -19.744,-9.34 ; -20.793,-9.358 -19.744,-9.358 ; -20.757,-9.376 -19.744,-9.376 ; -20.722,-9.393 -19.744,-9.393 ; -20.686,-9.411 -19.744,-9.411 ; -20.65,-9.429 -19.744,-9.429 ; -20.615,-9.447 -19.744,-9.447 ; -20.597,-9.465 -19.744,-9.465 ; -20.562,-9.482 -19.744,-9.482 ; -20.544,-9.5 -19.744,-9.5 ; -20.526,-9.518 -19.744,-9.518 ; -20.508,-9.536 -19.744,-9.536 ; -20.473,-9.553 -19.744,-9.553 ; -20.455,-9.571 -19.744,-9.571 ; -20.437,-9.589 -19.744,-9.589 ; -20.419,-9.607 -19.744,-9.607 ; -20.402,-9.625 -19.744,-9.625 ; -20.384,-9.66 -19.744,-9.66 ; -20.384,-9.642 -19.744,-9.642 ; -20.366,-9.678 -19.744,-9.678 ; -20.348,-9.696 -19.744,-9.696 ; -20.33,-9.713 -19.744,-9.713 ; -20.313,-9.749 -19.744,-9.749 ; -20.313,-9.731 -19.744,-9.731 ; -20.295,-9.767 -19.744,-9.767 ; -20.277,-9.785 -19.744,-9.785 ; -20.259,-9.82 -19.744,-9.82 ; -20.259,-9.802 -19.744,-9.802 ; -20.242,-9.856 -19.744,-9.856 ; -20.242,-9.838 -19.744,-9.838 ; -20.224,-9.873 -19.744,-9.873 ; -20.206,-9.927 -19.744,-9.927 ; -20.206,-9.909 -19.744,-9.909 ; -20.206,-9.891 -19.744,-9.891 ; -20.188,-9.962 -19.744,-9.962 ; -20.188,-9.945 -19.744,-9.945 ; -20.17,-9.998 -19.744,-9.998 ; -20.17,-9.98 -19.744,-9.98 ; -20.153,-10.051 -19.744,-10.051 ; -20.153,-10.033 -19.744,-10.033 ; -20.153,-10.016 -19.744,-10.016 ; -20.135,-10.122 -19.744,-10.122 ; -20.135,-10.105 -19.744,-10.105 ; -20.135,-10.087 -19.744,-10.087 ; -20.135,-10.069 -19.744,-10.069 ; -20.117,-13.732 -19.744,-13.732 ; -20.117,-13.714 -19.744,-13.714 ; -20.117,-13.696 -19.744,-13.696 ; -20.117,-13.678 -19.744,-13.678 ; -20.117,-13.661 -19.744,-13.661 ; -20.117,-13.643 -19.744,-13.643 ; -20.117,-13.625 -19.744,-13.625 ; -20.117,-13.607 -19.744,-13.607 ; -20.117,-13.589 -19.744,-13.589 ; -20.117,-13.572 -19.744,-13.572 ; -20.117,-13.554 -19.744,-13.554 ; -20.117,-13.536 -19.744,-13.536 ; -20.117,-13.518 -19.744,-13.518 ; -20.117,-13.501 -19.744,-13.501 ; -20.117,-13.483 -19.744,-13.483 ; -20.117,-13.465 -19.744,-13.465 ; -20.117,-13.447 -19.744,-13.447 ; -20.117,-13.429 -19.744,-13.429 ; -20.117,-13.412 -19.744,-13.412 ; -20.117,-13.394 -19.744,-13.394 ; -20.117,-13.376 -19.744,-13.376 ; -20.117,-13.358 -19.744,-13.358 ; -20.117,-13.341 -19.744,-13.341 ; -20.117,-13.323 -19.744,-13.323 ; -20.117,-13.305 -19.744,-13.305 ; -20.117,-13.287 -19.744,-13.287 ; -20.117,-13.269 -19.744,-13.269 ; -20.117,-13.252 -19.744,-13.252 ; -20.117,-13.234 -19.744,-13.234 ; -20.117,-13.216 -19.744,-13.216 ; -20.117,-13.198 -19.744,-13.198 ; -20.117,-13.181 -19.744,-13.181 ; -20.117,-13.163 -19.744,-13.163 ; -20.117,-13.145 -19.744,-13.145 ; -20.117,-13.127 -19.744,-13.127 ; -20.117,-13.109 -19.744,-13.109 ; -20.117,-13.092 -19.744,-13.092 ; -20.117,-13.074 -19.744,-13.074 ; -20.117,-13.056 -19.744,-13.056 ; -20.117,-13.038 -19.744,-13.038 ; -20.117,-13.021 -19.744,-13.021 ; -20.117,-13.003 -19.744,-13.003 ; -20.117,-12.985 -19.744,-12.985 ; -20.117,-12.967 -19.744,-12.967 ; -20.117,-12.949 -19.744,-12.949 ; -20.117,-12.932 -19.744,-12.932 ; -20.117,-12.914 -19.744,-12.914 ; -20.117,-12.896 -19.744,-12.896 ; -20.117,-12.878 -19.744,-12.878 ; -20.117,-12.861 -19.744,-12.861 ; -20.117,-12.843 -19.744,-12.843 ; -20.117,-12.825 -19.744,-12.825 ; -20.117,-12.807 -19.744,-12.807 ; -20.117,-12.789 -19.744,-12.789 ; -20.117,-12.772 -19.744,-12.772 ; -20.117,-12.754 -19.744,-12.754 ; -20.117,-12.736 -19.744,-12.736 ; -20.117,-12.718 -19.744,-12.718 ; -20.117,-12.7 -19.744,-12.7 ; -20.117,-12.683 -19.744,-12.683 ; -20.117,-12.665 -19.744,-12.665 ; -20.117,-12.647 -19.744,-12.647 ; -20.117,-12.629 -19.744,-12.629 ; -20.117,-12.612 -19.744,-12.612 ; -20.117,-12.594 -19.744,-12.594 ; -20.117,-12.576 -19.744,-12.576 ; -20.117,-12.558 -19.744,-12.558 ; -20.117,-12.54 -19.744,-12.54 ; -20.117,-12.523 -19.744,-12.523 ; -20.117,-12.505 -19.744,-12.505 ; -20.117,-12.487 -19.744,-12.487 ; -20.117,-12.469 -19.744,-12.469 ; -20.117,-12.452 -19.744,-12.452 ; -20.117,-12.434 -19.744,-12.434 ; -20.117,-12.416 -19.744,-12.416 ; -20.117,-12.398 -19.744,-12.398 ; -20.117,-12.38 -19.744,-12.38 ; -20.117,-12.363 -19.744,-12.363 ; -20.117,-12.345 -19.744,-12.345 ; -20.117,-12.327 -19.744,-12.327 ; -20.117,-12.309 -19.744,-12.309 ; -20.117,-12.292 -19.744,-12.292 ; -20.117,-12.274 -19.744,-12.274 ; -20.117,-12.256 -19.744,-12.256 ; -20.117,-12.238 -19.744,-12.238 ; -20.117,-12.22 -19.744,-12.22 ; -20.117,-12.203 -19.744,-12.203 ; -20.117,-12.185 -19.744,-12.185 ; -20.117,-12.167 -19.744,-12.167 ; -20.117,-12.149 -19.744,-12.149 ; -20.117,-12.132 -19.744,-12.132 ; -20.117,-12.114 -19.744,-12.114 ; -20.117,-12.096 -19.744,-12.096 ; -20.117,-12.078 -19.744,-12.078 ; -20.117,-12.06 -19.744,-12.06 ; -20.117,-12.043 -19.744,-12.043 ; -20.117,-12.025 -19.744,-12.025 ; -20.117,-12.007 -19.744,-12.007 ; -20.117,-11.989 -19.744,-11.989 ; -20.117,-11.972 -19.744,-11.972 ; -20.117,-11.954 -19.744,-11.954 ; -20.117,-11.936 -19.744,-11.936 ; -20.117,-11.918 -19.744,-11.918 ; -20.117,-11.9 -19.744,-11.9 ; -20.117,-11.883 -19.744,-11.883 ; -20.117,-11.865 -19.744,-11.865 ; -20.117,-11.847 -19.744,-11.847 ; -20.117,-11.829 -19.744,-11.829 ; -20.117,-11.811 -19.744,-11.811 ; -20.117,-11.794 -19.744,-11.794 ; -20.117,-11.776 -19.744,-11.776 ; -20.117,-11.758 -19.744,-11.758 ; -20.117,-11.74 -19.744,-11.74 ; -20.117,-11.723 -19.744,-11.723 ; -20.117,-11.705 -19.744,-11.705 ; -20.117,-11.687 -19.744,-11.687 ; -20.117,-11.669 -19.744,-11.669 ; -20.117,-11.651 -19.744,-11.651 ; -20.117,-11.634 -19.744,-11.634 ; -20.117,-11.616 -19.744,-11.616 ; -20.117,-11.598 -19.744,-11.598 ; -20.117,-11.58 -19.744,-11.58 ; -20.117,-11.563 -19.744,-11.563 ; -20.117,-11.545 -19.744,-11.545 ; -20.117,-11.527 -19.744,-11.527 ; -20.117,-11.509 -19.744,-11.509 ; -20.117,-11.491 -19.744,-11.491 ; -20.117,-11.474 -19.744,-11.474 ; -20.117,-11.456 -19.744,-11.456 ; -20.117,-11.438 -19.744,-11.438 ; -20.117,-11.42 -19.744,-11.42 ; -20.117,-11.403 -19.744,-11.403 ; -20.117,-11.385 -19.744,-11.385 ; -20.117,-11.367 -19.744,-11.367 ; -20.117,-11.349 -19.744,-11.349 ; -20.117,-11.331 -19.744,-11.331 ; -20.117,-11.314 -19.744,-11.314 ; -20.117,-11.296 -19.744,-11.296 ; -20.117,-11.278 -19.744,-11.278 ; -20.117,-11.26 -19.744,-11.26 ; -20.117,-11.243 -19.744,-11.243 ; -20.117,-11.225 -19.744,-11.225 ; -20.117,-11.207 -19.744,-11.207 ; -20.117,-11.189 -19.744,-11.189 ; -20.117,-11.171 -19.744,-11.171 ; -20.117,-11.154 -19.744,-11.154 ; -20.117,-11.136 -19.744,-11.136 ; -20.117,-11.118 -19.744,-11.118 ; -20.117,-11.1 -19.744,-11.1 ; -20.117,-11.083 -19.744,-11.083 ; -20.117,-11.065 -19.744,-11.065 ; -20.117,-11.047 -19.744,-11.047 ; -20.117,-11.029 -19.744,-11.029 ; -20.117,-11.011 -19.744,-11.011 ; -20.117,-10.994 -19.744,-10.994 ; -20.117,-10.976 -19.744,-10.976 ; -20.117,-10.958 -19.744,-10.958 ; -20.117,-10.94 -19.744,-10.94 ; -20.117,-10.922 -19.744,-10.922 ; -20.117,-10.905 -19.744,-10.905 ; -20.117,-10.887 -19.744,-10.887 ; -20.117,-10.869 -19.744,-10.869 ; -20.117,-10.851 -19.744,-10.851 ; -20.117,-10.834 -19.744,-10.834 ; -20.117,-10.816 -19.744,-10.816 ; -20.117,-10.798 -19.744,-10.798 ; -20.117,-10.78 -19.744,-10.78 ; -20.117,-10.762 -19.744,-10.762 ; -20.117,-10.745 -19.744,-10.745 ; -20.117,-10.727 -19.744,-10.727 ; -20.117,-10.709 -19.744,-10.709 ; -20.117,-10.691 -19.744,-10.691 ; -20.117,-10.674 -19.744,-10.674 ; -20.117,-10.656 -19.744,-10.656 ; -20.117,-10.638 -19.744,-10.638 ; -20.117,-10.62 -19.744,-10.62 ; -20.117,-10.602 -19.744,-10.602 ; -20.117,-10.585 -19.744,-10.585 ; -20.117,-10.567 -19.744,-10.567 ; -20.117,-10.549 -19.744,-10.549 ; -20.117,-10.531 -19.744,-10.531 ; -20.117,-10.514 -19.744,-10.514 ; -20.117,-10.496 -19.744,-10.496 ; -20.117,-10.478 -19.744,-10.478 ; -20.117,-10.46 -19.744,-10.46 ; -20.117,-10.442 -19.744,-10.442 ; -20.117,-10.425 -19.744,-10.425 ; -20.117,-10.407 -19.744,-10.407 ; -20.117,-10.389 -19.744,-10.389 ; -20.117,-10.371 -19.744,-10.371 ; -20.117,-10.354 -19.744,-10.354 ; -20.117,-10.336 -19.744,-10.336 ; -20.117,-10.318 -19.744,-10.318 ; -20.117,-10.3 -19.744,-10.3 ; -20.117,-10.282 -19.744,-10.282 ; -20.117,-10.265 -19.744,-10.265 ; -20.117,-10.247 -19.744,-10.247 ; -20.117,-10.229 -19.744,-10.229 ; -20.117,-10.211 -19.744,-10.211 ; -20.117,-10.194 -19.744,-10.194 ; -20.117,-10.176 -19.744,-10.176 ; -20.117,-10.158 -19.744,-10.158 ; -20.117,-10.14 -19.744,-10.14

## Polygon pours and split planes (outlines as drawn)
GND on Top Layer "GND_L01_P000" (solid, remove dead copper, pour order 0): -53,18 0,18 0,-18 -53,-18
GND on Bottom Layer "GND_L02_P001" (solid, remove dead copper, pour order 1): -53,-18 0,-18 0,18 -53,18

## Keep-outs
Keep-Out Layer:
  the board outline again, w0.2

## Silkscreen, mask and mechanical layers (free items; w line width, h text height)
Top Overlay:
  drawing of 2276 lines, arcs and shapes, not listed
  text "Mehdi" at -9.4,8.6 h2
Bottom Overlay:
  text "Mehdi" at -5.1,5.5 h2